# Altium PCB SPTSquidBoardRev0.PcbDoc (part 1 of 2)
Units mil, origin at the board's own origin, x right, y up, seen from the top; angles counter-clockwise.
Board outline 7119.46 x 1780.03 mil, 6 copper layers (Top Layer, Internal Plane 1, Mid-Layer 1, Mid-Layer 2, Internal Plane 2, Bottom Layer), stack 48.451 mil thick; 66 components, 109 nets, 344 pads, 93 vias.
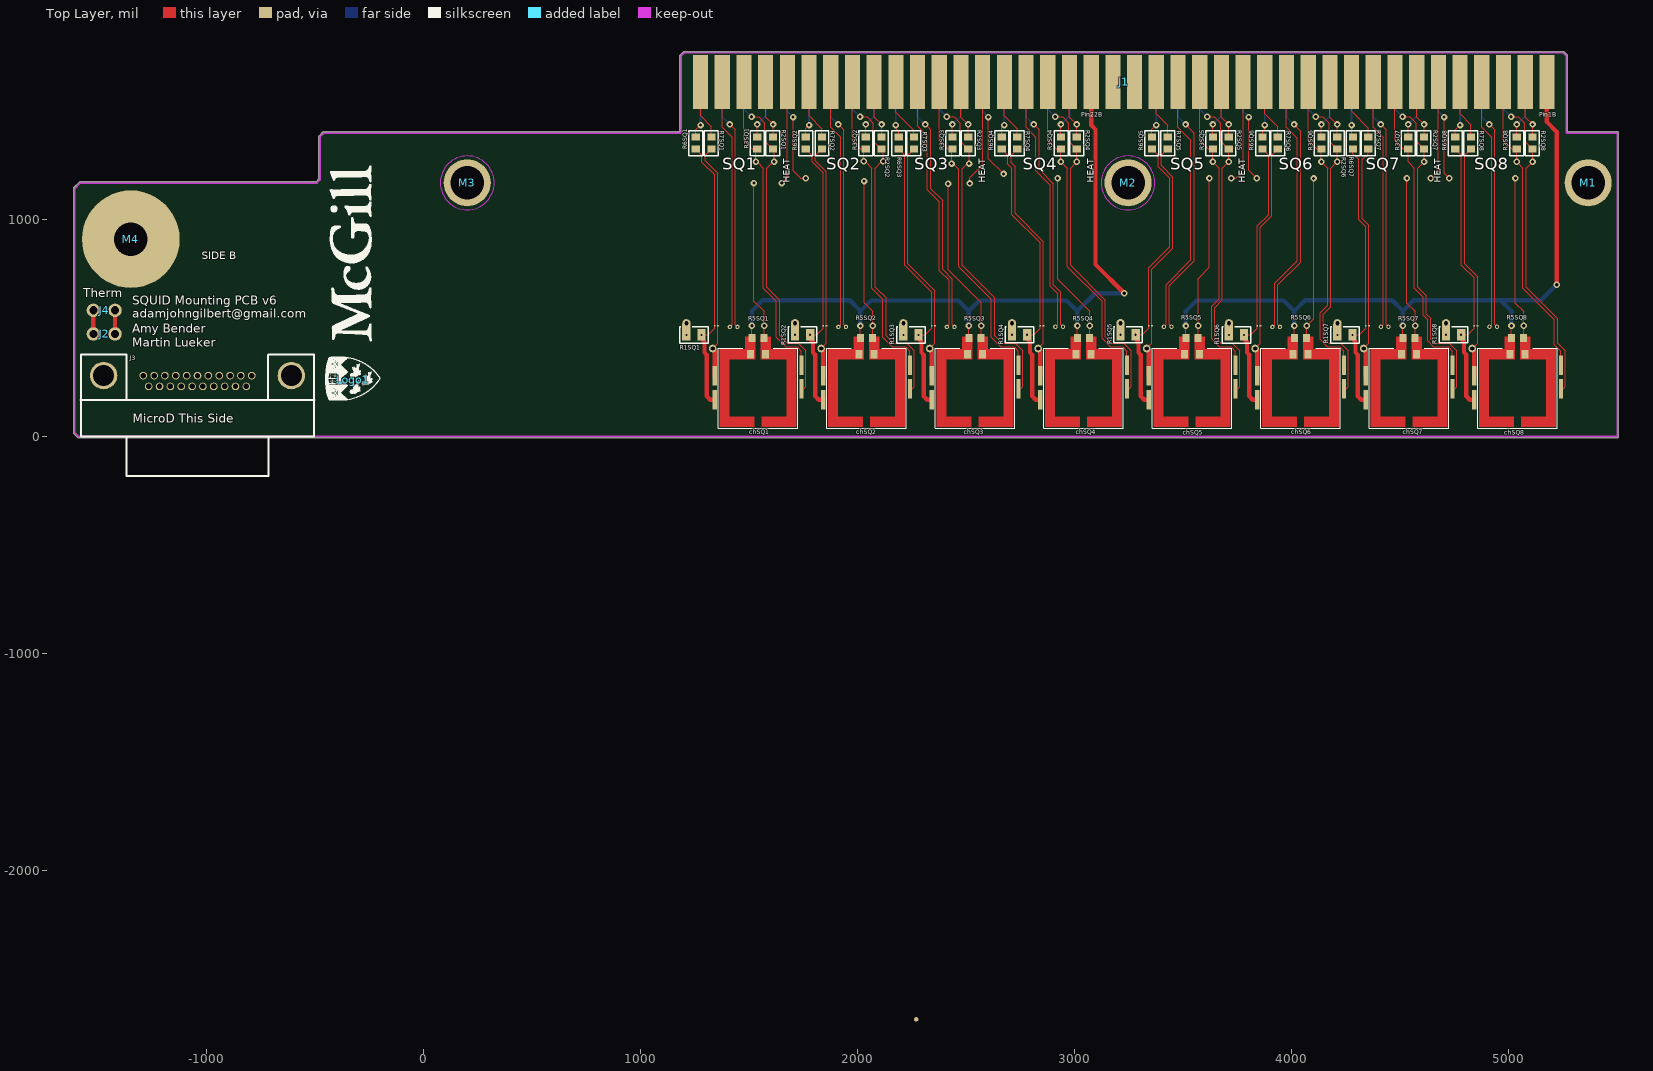
[diagram p0: Top Layer view]
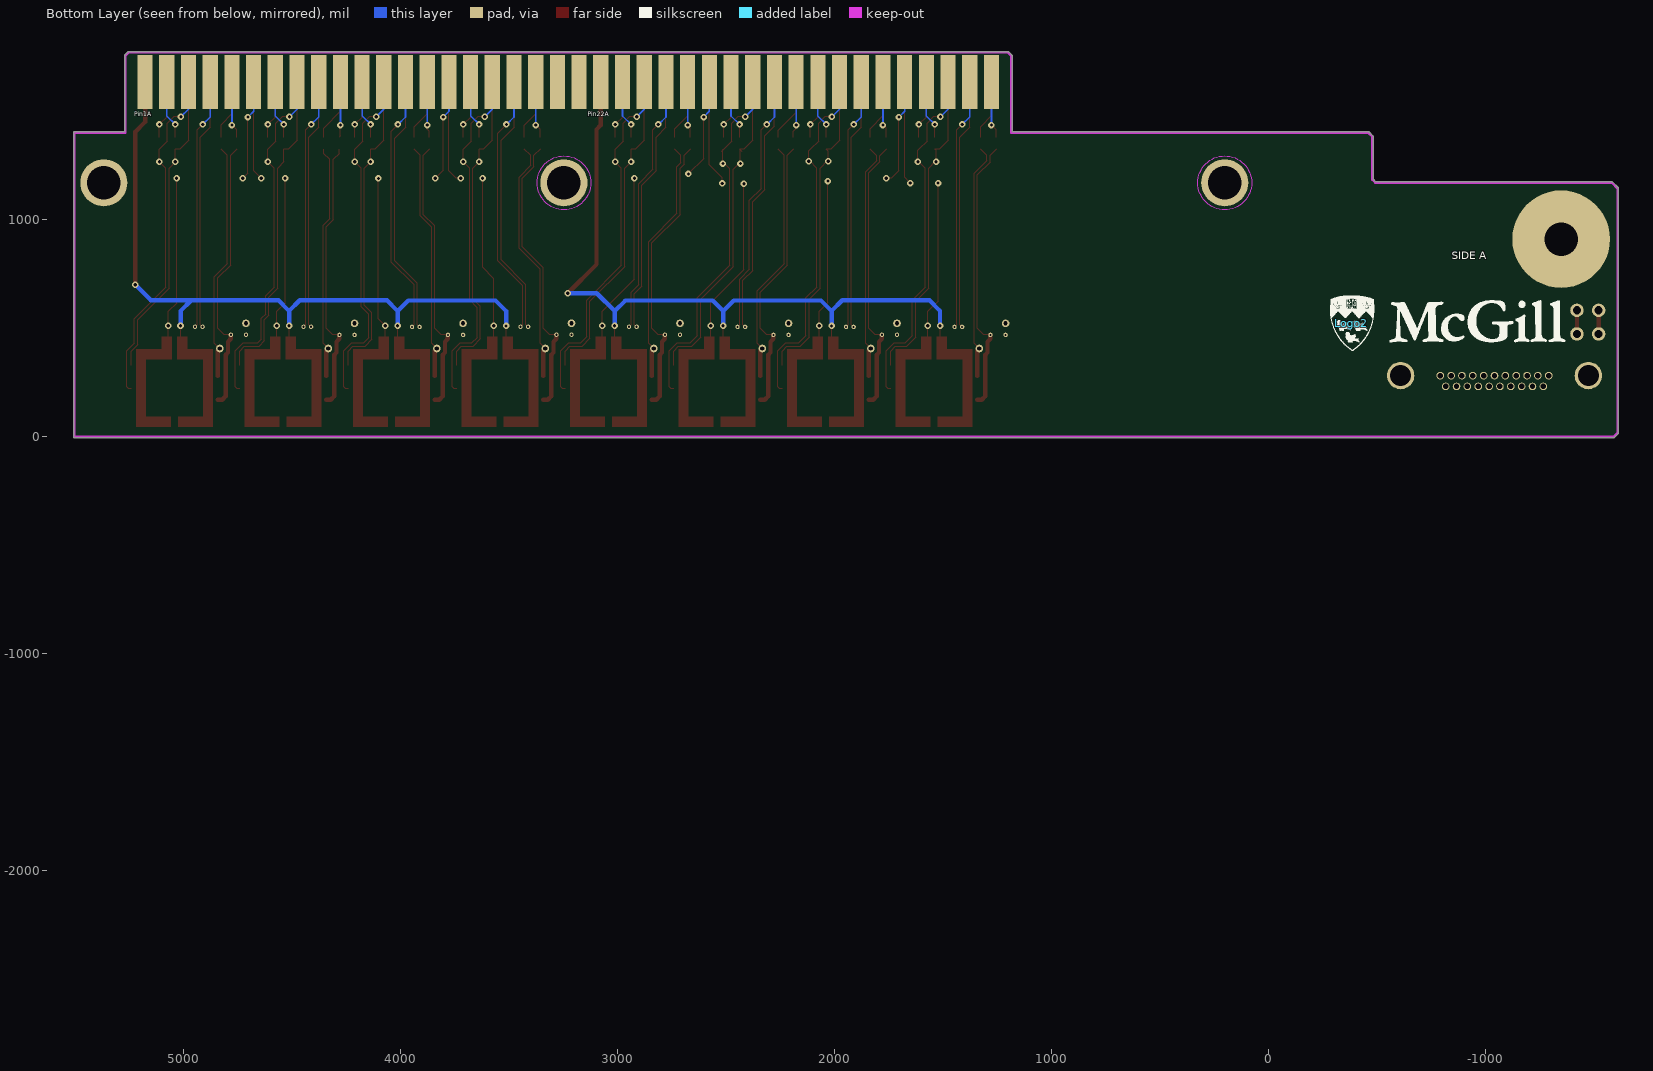
[diagram p1: Bottom Layer view, seen from below]
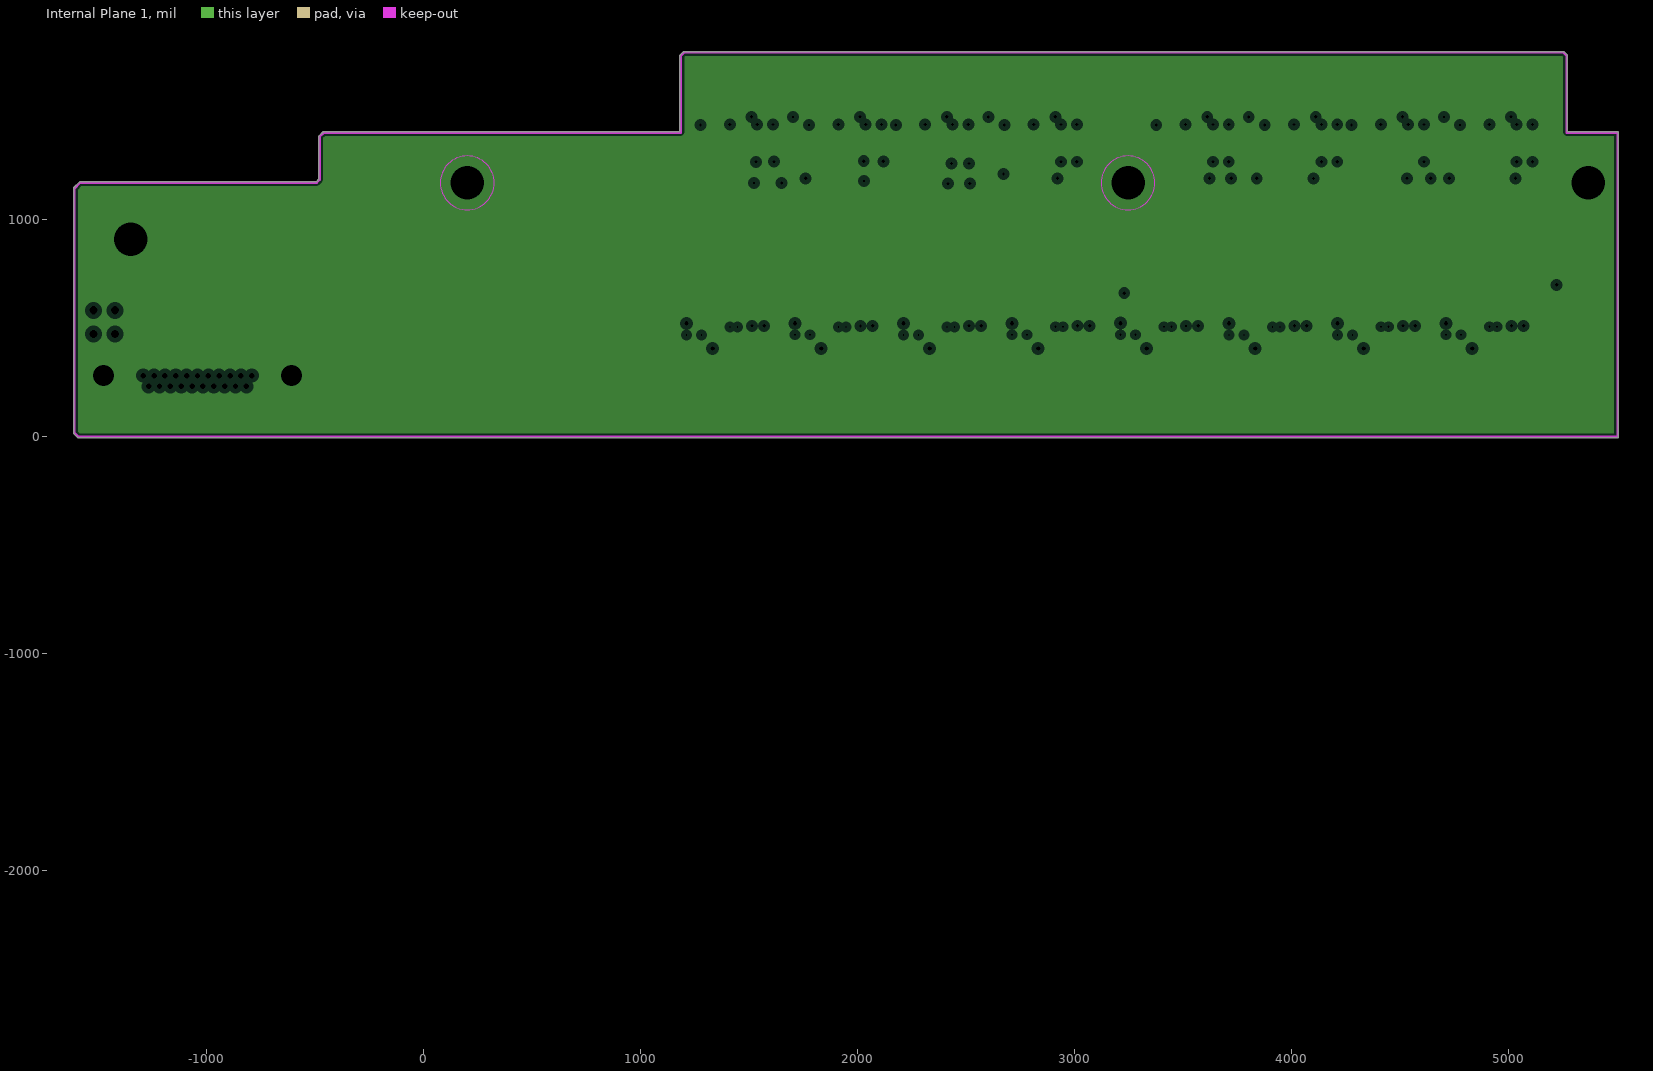
[diagram p2: Internal Plane 1, clearances drawn from the general rule]
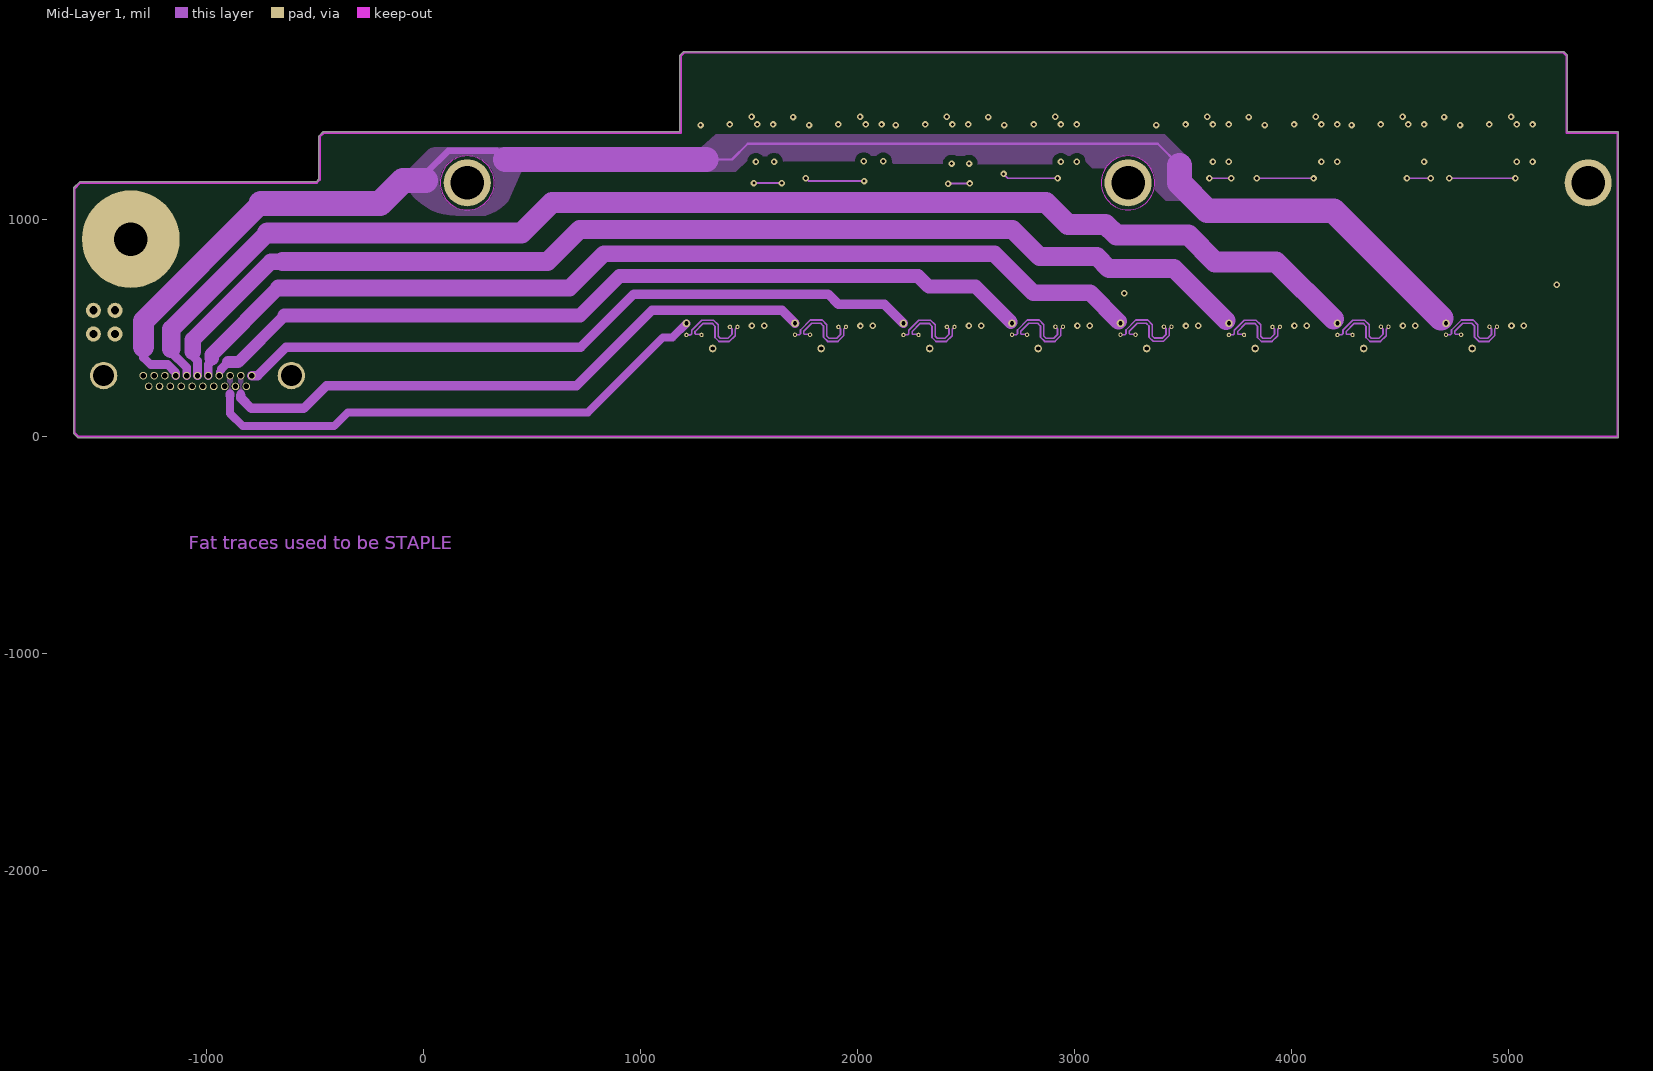
[diagram p3: Mid-Layer 1]
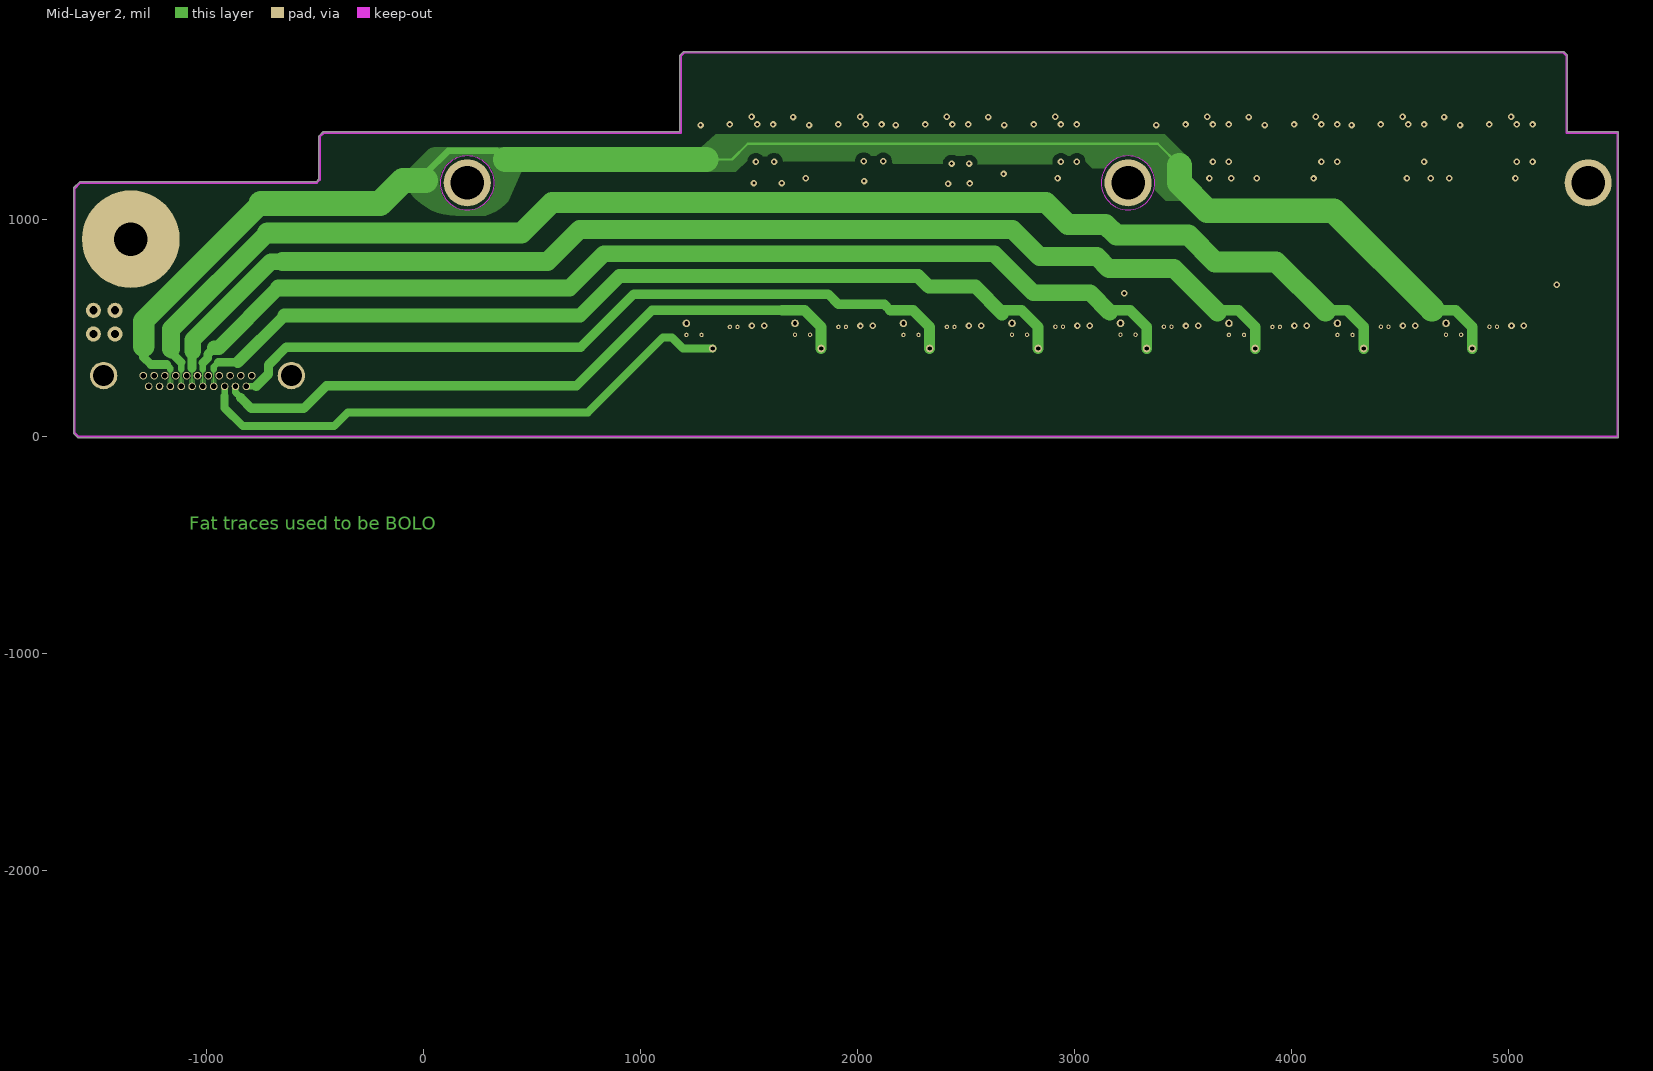
[diagram p4: Mid-Layer 2]
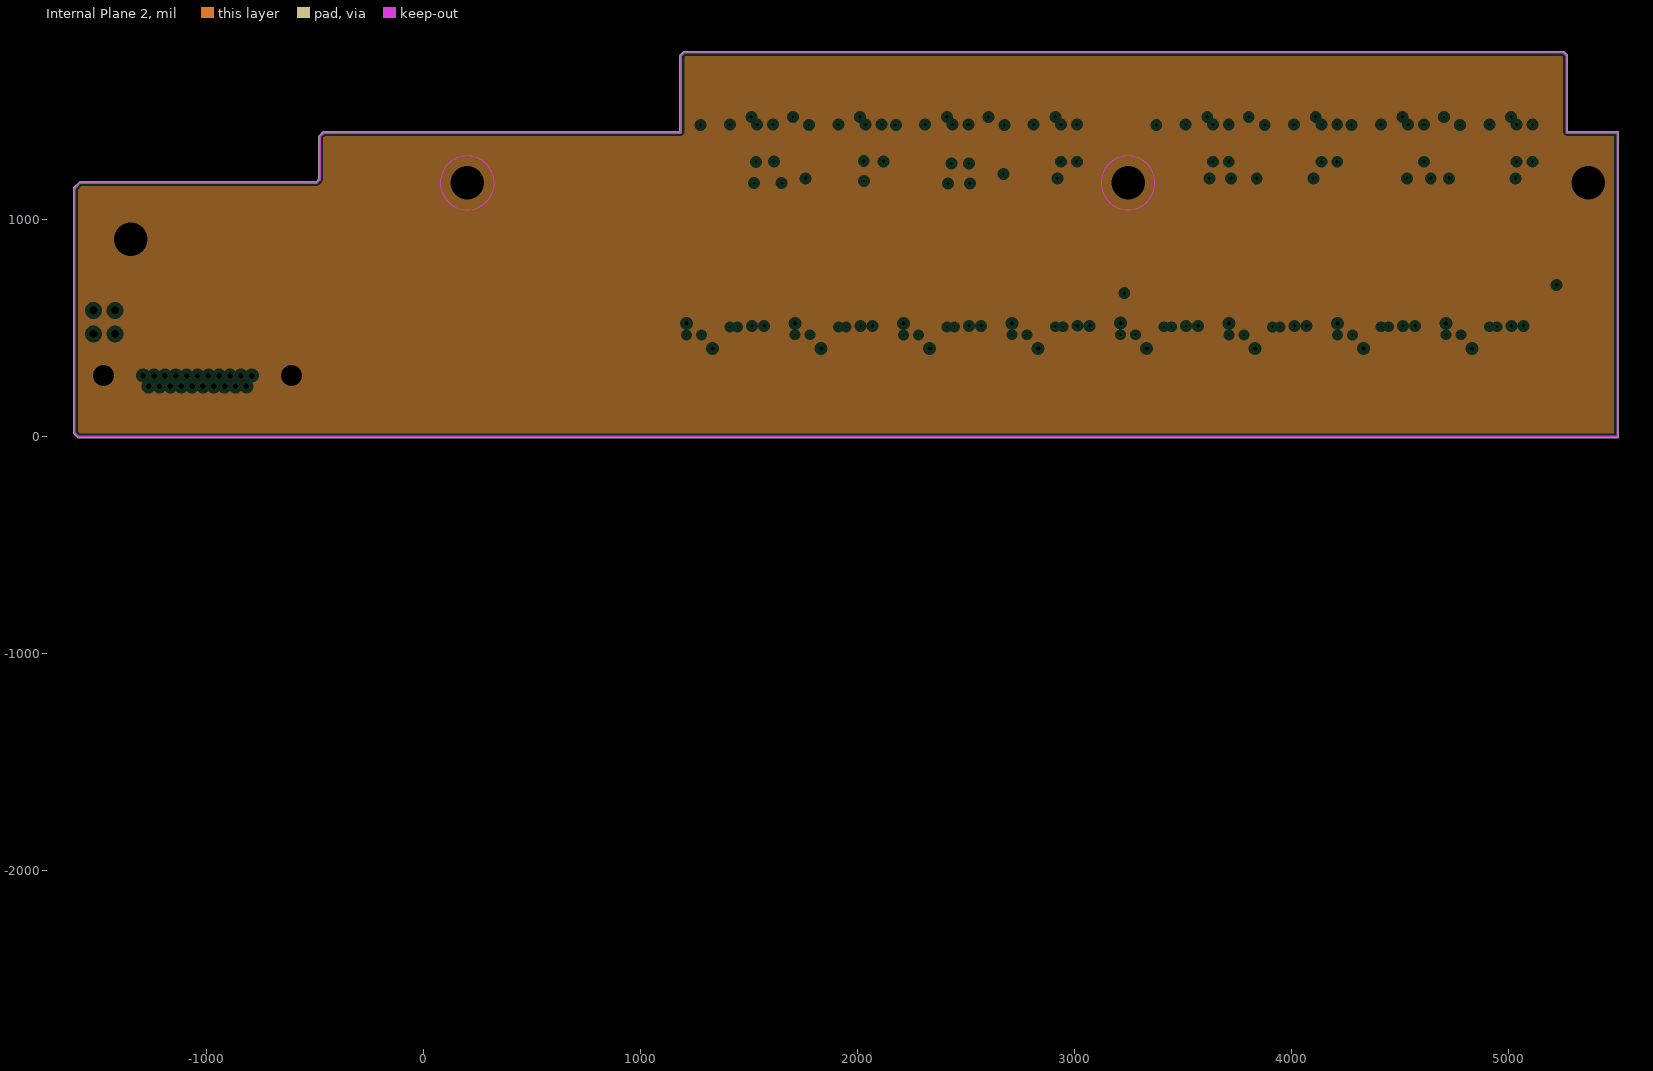
[diagram p5: Internal Plane 2, clearances drawn from the general rule]

## Layer stack, top to bottom
Top Solder: solder mask 0.4, Solder Resist, Dk 3.5
Top Layer: signal copper 1.4
Dielectric 1: core 10, FR-4, Dk 4.2
Internal Plane 1: plane copper 1.417, net GND_POWER
Dielectric 2: prepreg 5, Dk 4.2
Mid-Layer 1: signal copper 1.417
Dielectric 3: core 10, FR-4, Dk 4.2
Mid-Layer 2: signal copper 1.4
Dielectric 4: prepreg 5, Dk 4.2
Internal Plane 2: plane copper 1.417, net GND_POWER
Dielectric 5: core 10, Dk 4.2
Bottom Layer: signal copper 1.4
Bottom Solder: solder mask 0.4, Solder Resist, Dk 3.5

## Board outline
-1612.96,14.15 cw(c-1609.43,17.72) -1614.44,17.72 -1614.44,1143.39 cw(c-1609.43,1143.39) -1612.96,1146.96 -1612.97,1146.94 -1586.37,1173.54 -1586.38,1173.53 cw(c-1582.82,1170) -1582.82,1175.01 -495.35,1175.01 -484.41,1185.95 -484.41,1382.7 cw(c-479.39,1382.7) -482.92,1386.26 -482.94,1386.25 -465.95,1403.24 -465.96,1403.22 cw(c-462.4,1399.69) -462.4,1404.71 878.27,1404.71 cw(c880,1400) 880,1405.02 1179.98,1405.02 1179.98,1755 cw(c1185,1755) 1181.47,1758.56 1181.45,1758.55 1196.45,1773.55 1196.44,1773.53 cw(c1200,1770) 1200,1775.02 5250,1775.02 cw(c5250,1770) 5253.56,1773.53 5253.55,1773.55 5268.55,1758.55 5268.53,1758.56 cw(c5265,1755) 5270.02,1755 5270.02,1405.02 5500,1405.02 cw(c5500,1400) 5505.02,1400 cw(c5500,1400) 5505.01,1399.93 5505.01,0 cw(c5500,0) 5500,-5.01 -1591.71,-5.01 cw(c-1591.71,0) -1595.27,-3.53 -1595.26,-3.55

## Design rules (kind name [scope] priority, off if disabled: settings)
Clearance ClearanceKeepOut [OnLayer('Keep-Out Layer')] p1: gap=1
Clearance [All] p2: gap=5 except(20: Track-Poly Track-Region Via-Poly Via-Region)
DiffPairsRouting DiffPairsRouting_TopDiffPairs [InNetClass('Feedback') or InNetClass('SquidOut')] p1: maxlimit=100 minlimit=5 mostfreqgap=10 toplayer_minwidth=5 toplayer_maxwidth=20 toplayer_prefwidth=5 midlayer1_mingap=10 midlayer1_maxgap=10 midlayer1_minwidth=15 midlayer1_maxwidth=200 midlayer1_prefwidth=15 midlayer2_mingap=10 midlayer2_maxgap=10 midlayer2_minwidth=15 midlayer2_maxwidth=200 midlayer2_prefwidth=15 bottomlayer_prefgap=7 bottomlayer_minwidth=5 bottomlayer_maxwidth=20 bottomlayer_prefwidth=8 maxuncoupledlength=500
DiffPairsRouting [All] p2: maxlimit=100 minlimit=5 mostfreqgap=7 toplayer_minwidth=5 toplayer_maxwidth=200 toplayer_prefwidth=8 midlayer1_minwidth=5 midlayer1_maxwidth=200 midlayer1_prefwidth=8 midlayer2_minwidth=5 midlayer2_maxwidth=200 midlayer2_prefwidth=8 bottomlayer_minwidth=5 bottomlayer_maxwidth=200 bottomlayer_prefwidth=8 maxuncoupledlength=500
HoleSize [All] p1: absolutevalues=TRUE maxlimit=500 minlimit=1 maxpercent=80.000 minpercent=20.000
MinimumSolderMaskSliver MinimumSolderMaskSliver_Track [IsTrack vs IsTrack] p1: minsoldermaskwidth=1
MinimumSolderMaskSliver [All] p2: minsoldermaskwidth=5
NetAntennae NetAntennae_Heaters [InNetClass('Heater')] p1: netantennaetolerance=2000
NetAntennae [All] p2: netantennaetolerance=0
PlaneClearance [All] p1: clearance=20
PlaneConnect [All] p1: planeconnectstyle=Relief reliefexpansion=20 reliefentries=4 reliefconductorwidth=10 reliefairgap=10
PolygonConnect [All] p1: connectstyle=Direct reliefconductorwidth=10 reliefentries=4 polygonreliefangle="90 Angle" airgapwidth=10
RoutingVias [All] p1: holewidth=28 width=50 viastyle="Through Hole" minholewidth=28 minwidth=50 maxholewidth=28 maxwidth=50
SilkToBoardRegionClearance [All] p1 off:
SilkToSilkClearance [All] p1: silktosilkclearance=0
SilkToSolderMaskClearance [IsPad] p1: minsilkscreentomaskgap=5 clearancetoexposedcopper=TRUE
SolderMaskExpansion [All] p1: expansion=0
Width Width_LowInd [InNetClass('LowInductance')] p1: maxlimit=200 minlimit=10 preferedwidth=54 toplayer_minwidth=20 toplayer_prefwidth=20 midlayer1_minwidth=50 midlayer2_minwidth=50 bottomlayer_maxwidth=10 bottomlayer_prefwidth=10 minimp=50.000000 maximp=50.000000 favimp=50.000000
Width [All] p2: maxlimit=200 minlimit=5 preferedwidth=10 minimp=50.000000 maximp=50.000000 favimp=50.000000
21 further rules are at their usual default settings.

## Classes and differential pairs
net class SquidOut: SQ_OUT_N1 SQ_OUT_N2 SQ_OUT_N3 SQ_OUT_N4 SQ_OUT_N5 SQ_OUT_N6 SQ_OUT_N7 SQ_OUT_N8 SQ_OUT_P1 SQ_OUT_P2 SQ_OUT_P3 SQ_OUT_P4 SQ_OUT_P5 SQ_OUT_P6 SQ_OUT_P7 SQ_OUT_P8
net class HEATER[1..8]: HEATER1 HEATER2 HEATER3 HEATER4 HEATER5 HEATER6 HEATER7 HEATER8
net class SQ_OUT_P[1..8]: SQ_OUT_P1 SQ_OUT_P2 SQ_OUT_P3 SQ_OUT_P4 SQ_OUT_P5 SQ_OUT_P6 SQ_OUT_P7 SQ_OUT_P8
net class SQ_OUT_N[1..8]: SQ_OUT_N1 SQ_OUT_N2 SQ_OUT_N3 SQ_OUT_N4 SQ_OUT_N5 SQ_OUT_N6 SQ_OUT_N7 SQ_OUT_N8
net class SQ_IV_P[1..8]: SQ_IV_P1 SQ_IV_P2 SQ_IV_P3 SQ_IV_P4 SQ_IV_P5 SQ_IV_P6 SQ_IV_P7 SQ_IV_P8
net class SQ_IV_N[1..8]: SQ_IV_N1 SQ_IV_N2 SQ_IV_N3 SQ_IV_N4 SQ_IV_N5 SQ_IV_N6 SQ_IV_N7 SQ_IV_N8
component class SQ1: chSQ1 R1SQ1 R2SQ1 R3SQ1 R5SQ1 R6SQ1 R7SQ1
component class SQ2: chSQ2 R1SQ2 R2SQ2 R3SQ2 R5SQ2 R6SQ2 R7SQ2
component class SQ3: chSQ3 R1SQ3 R2SQ3 R3SQ3 R5SQ3 R6SQ3 R7SQ3
component class SQ4: chSQ4 R1SQ4 R2SQ4 R3SQ4 R5SQ4 R6SQ4 R7SQ4
component class SQ5: chSQ5 R1SQ5 R2SQ5 R3SQ5 R5SQ5 R6SQ5 R7SQ5
component class SQ6: chSQ6 R1SQ6 R2SQ6 R3SQ6 R5SQ6 R6SQ6 R7SQ6
component class SQ7: chSQ7 R1SQ7 R2SQ7 R3SQ7 R5SQ7 R6SQ7 R7SQ7
component class SQ8: chSQ8 R1SQ8 R2SQ8 R3SQ8 R5SQ8 R6SQ8 R7SQ8
channel class SquidPage: SQUID1 SQUID2 SQUID3 SQUID4 SQUID5 SQUID6 SQUID7 SQUID8
component class SPTSquidBoard: J1 J2 J3 J4 Logo1 Logo2 M1 M2 M3 M4
net class HEATERG[1..8]: HEATERG4 HEATERG8
net class Heater: HEATER1 HEATER2 HEATER3 HEATER4 HEATER5 HEATER6 HEATER7 HEATER8 HEATERG4 HEATERG8
net class WIRE_N[1..8]: WIRE_N1 WIRE_N2 WIRE_N3 WIRE_N4 WIRE_N5 WIRE_N6 WIRE_N7 WIRE_N8
net class WIRE_P[1..8]: WIRE_P1 WIRE_P2 WIRE_P3 WIRE_P4 WIRE_P5 WIRE_P6 WIRE_P7 WIRE_P8
net class CAR_N[1..8]: CAR_N1 CAR_N2 CAR_N3 CAR_N4 CAR_N5 CAR_N6 CAR_N7 CAR_N8
net class CAR_P[1..8]: CAR_P1 CAR_P2 CAR_P3 CAR_P4 CAR_P5 CAR_P6 CAR_P7 CAR_P8
net class NULL_N[1..8]: NULL_N1 NULL_N2 NULL_N3 NULL_N4 NULL_N5 NULL_N6 NULL_N7 NULL_N8
net class NULL_P[1..8]: NULL_P1 NULL_P2 NULL_P3 NULL_P4 NULL_P5 NULL_P6 NULL_P7 NULL_P8
net class Nul: NSQSQ1_N NSQSQ1_P NSQSQ2_N NSQSQ2_P NSQSQ3_N NSQSQ3_P NSQSQ4_N NSQSQ4_P NSQSQ5_N NSQSQ5_P NSQSQ6_N NSQSQ6_P NSQSQ7_N NSQSQ7_P NSQSQ8_N NSQSQ8_P NULL_N1 NULL_N2 NULL_N3 NULL_N4 NULL_N5 NULL_N6 NULL_N7 NULL_N8 NULL_P1 NULL_P2 NULL_P3 NULL_P4 NULL_P5 NULL_P6 NULL_P7 NULL_P8
net class LowInductance: WIRE_N1 WIRE_N2 WIRE_N3 WIRE_N4 WIRE_N5 WIRE_N6 WIRE_N7 WIRE_N8 WIRE_P1 WIRE_P2 WIRE_P3 WIRE_P4 WIRE_P5 WIRE_P6 WIRE_P7 WIRE_P8
differential pair NSQSQ8: +NSQSQ8_P -NSQSQ8_N
differential pair NSQSQ7: +NSQSQ7_P -NSQSQ7_N
differential pair NSQSQ6: +NSQSQ6_P -NSQSQ6_N
differential pair NSQSQ5: +NSQSQ5_P -NSQSQ5_N
differential pair NSQSQ4: +NSQSQ4_P -NSQSQ4_N
differential pair NSQSQ3: +NSQSQ3_P -NSQSQ3_N
differential pair NSQSQ2: +NSQSQ2_P -NSQSQ2_N
differential pair NSQSQ1: +NSQSQ1_P -NSQSQ1_N
differential pair SQ_OUT8: +SQ_OUT_P8 -SQ_OUT_N8
differential pair SQ_OUT7: +SQ_OUT_P7 -SQ_OUT_N7
differential pair SQ_OUT6: +SQ_OUT_P6 -SQ_OUT_N6
differential pair SQ_OUT5: +SQ_OUT_P5 -SQ_OUT_N5
differential pair SQ_OUT4: +SQ_OUT_P4 -SQ_OUT_N4
differential pair SQ_OUT3: +SQ_OUT_P3 -SQ_OUT_N3
differential pair SQ_OUT2: +SQ_OUT_P2 -SQ_OUT_N2
differential pair SQ_OUT1: +SQ_OUT_P1 -SQ_OUT_N1
differential pair SQ_IV8: +SQ_IV_P8 -SQ_IV_N8
differential pair SQ_IV7: +SQ_IV_P7 -SQ_IV_N7
differential pair SQ_IV6: +SQ_IV_P6 -SQ_IV_N6
differential pair SQ_IV5: +SQ_IV_P5 -SQ_IV_N5
differential pair SQ_IV4: +SQ_IV_P4 -SQ_IV_N4
differential pair SQ_IV3: +SQ_IV_P3 -SQ_IV_N3
differential pair SQ_IV2: +SQ_IV_P2 -SQ_IV_N2
differential pair SQ_IV1: +SQ_IV_P1 -SQ_IV_N1
differential pair WIRE1: +WIRE_P1 -WIRE_N1
differential pair WIRE2: +WIRE_P2 -WIRE_N2
differential pair WIRE3: +WIRE_P3 -WIRE_N3
differential pair WIRE4: +WIRE_P4 -WIRE_N4
differential pair WIRE5: +WIRE_P5 -WIRE_N5
differential pair WIRE6: +WIRE_P6 -WIRE_N6
differential pair WIRE7: +WIRE_P7 -WIRE_N7
differential pair WIRE8: +WIRE_P8 -WIRE_N8
differential pair CAR1: +CAR_P1 -CAR_N1
differential pair CAR2: +CAR_P2 -CAR_N2
differential pair CAR3: +CAR_P3 -CAR_N3
differential pair CAR4: +CAR_P4 -CAR_N4
differential pair CAR5: +CAR_P5 -CAR_N5
differential pair CAR6: +CAR_P6 -CAR_N6
differential pair CAR7: +CAR_P7 -CAR_N7
differential pair CAR8: +CAR_P8 -CAR_N8
differential pair NULL1: +NULL_P1 -NULL_N1
differential pair NULL2: +NULL_P2 -NULL_N2
differential pair NULL3: +NULL_P3 -NULL_N3
differential pair NULL4: +NULL_P4 -NULL_N4
differential pair NULL5: +NULL_P5 -NULL_N5
differential pair NULL6: +NULL_P6 -NULL_N6
differential pair NULL7: +NULL_P7 -NULL_N7
differential pair NULL8: +NULL_P8 -NULL_N8

## Components (designator, comment, footprint, x,y, rotation, side; value= is the part's Value field where it differs from the comment)
chSQ1 "Squid" SQUID 1520,250 r0 top net-tie (schematic designator ch)
chSQ2 "Squid" SQUID 2020,250 r0 top net-tie (schematic designator ch)
chSQ3 "Squid" SQUID 2520,250 r0 top net-tie (schematic designator ch)
chSQ4 "Squid" SQUID 3020,250 r0 top net-tie (schematic designator ch)
chSQ5 "Squid" SQUID 3520,250 r0 top net-tie (schematic designator ch)
chSQ6 "Squid" SQUID 4020,250 r0 top net-tie (schematic designator ch)
chSQ7 "Squid" SQUID 4520,250 r0 top net-tie (schematic designator ch)
chSQ8 "Squid" SQUID 5020,250 r0 top net-tie (schematic designator ch)
J1 "EDGE BOARD-2x40pin" "40 POS/80 CONNECTION, EDGE BOARD" 1275,1635 r0 top locked
J2 "TempSenseWireConnection" TempSenseWireCons -1422.93,473.38 r0 top
J3 "Omnetics MMDP-021-B01-R2" MMDP-021-B02-R2 -1043.13,281.58 r180 top
J4 "TempSenseWireConnection" TempSenseWireCons -1422.93,582.32 r0 top
Logo1 "McGillLogo1" McGillLogo1 -327.34,262.41 r90 top
Logo2 "McGillLogo1" McGillLogo1 -382.07,523.17 r180 bottom
M1 "Mounting hole" MountingHoleSquidBoard#1 5365,1170 r0 top
M2 "Mounting hole" MountingHoleSquidBoard#1 3245,1170 r0 top
M3 "Mounting hole" MountingHoleSquidBoard#1 200,1170 r0 top
M4 "Mounting hole" MountingHoleSquidBoard#2 -1350.13,908.97 r0 top
R1SQ1 "ResBias" 0805NetTie 1279.62,469.28 r180 top net-tie (schematic designator R1)
R1SQ2 "ResBias" 0805NetTie 1780,469.65 r180 top net-tie (schematic designator R1)
R1SQ3 "ResBias" 0805NetTie 2279.62,469.28 r180 top net-tie (schematic designator R1)
R1SQ4 "ResBias" 0805NetTie 2780,469.65 r180 top net-tie (schematic designator R1)
R1SQ5 "ResBias" 0805NetTie 3280,470 r180 top net-tie (schematic designator R1)
R1SQ6 "ResBias" 0805NetTie 3779.62,469.28 r180 top net-tie (schematic designator R1)
R1SQ7 "ResBias" 0805NetTie 4279.62,469.28 r180 top net-tie (schematic designator R1)
R1SQ8 "ResBias" 0805NetTie 4780,469.65 r180 top net-tie (schematic designator R1)
R2SQ1 "0603" 0603 1609,1325 r90 top (schematic designator R2)
R2SQ2 "0603" 0603 2109,1325 r90 top (schematic designator R2)
R2SQ3 "0603" 0603 2509,1325 r90 top (schematic designator R2)
R2SQ4 "0603" 0603 3009,1325 r90 top (schematic designator R2)
R2SQ5 "0603" 0603 3709,1325 r90 top (schematic designator R2)
R2SQ6 "0603" 0603 4209,1325 r90 top (schematic designator R2)
R2SQ7 "0603" 0603 4609,1325 r90 top (schematic designator R2)
R2SQ8 "0603" 0603 5109,1325 r90 top (schematic designator R2)
R3SQ1 "0603" 0603 1536,1381 r270 top (schematic designator R3)
R3SQ2 "0603" 0603 2036,1381 r270 top (schematic designator R3)
R3SQ3 "0603" 0603 2436,1381 r270 top (schematic designator R3)
R3SQ4 "0603" 0603 2936,1381 r270 top (schematic designator R3)
R3SQ5 "0603" 0603 3636,1381 r270 top (schematic designator R3)
R3SQ6 "0603" 0603 4136,1381 r270 top (schematic designator R3)
R3SQ7 "0603" 0603 4536,1381 r270 top (schematic designator R3)
R3SQ8 "0603" 0603 5036,1381 r270 top (schematic designator R3)
R5SQ1 "ResSquidBoard" 0603-NoSilk 1568,455 r180 top (schematic designator R5)
R5SQ2 "ResSquidBoard" 0603-NoSilk 2068,455 r180 top (schematic designator R5)
R5SQ3 "ResSquidBoard" 0603-NoSilk 2568,455 r180 top (schematic designator R5)
R5SQ4 "ResSquidBoard" 0603-NoSilk 3068,455 r180 top (schematic designator R5)
R5SQ5 "ResSquidBoard" 0603-NoSilk 3568,455 r180 top (schematic designator R5)
R5SQ6 "ResSquidBoard" 0603-NoSilk 4068,455 r180 top (schematic designator R5)
R5SQ7 "ResSquidBoard" 0603-NoSilk 4568,455 r180 top (schematic designator R5)
R5SQ8 "ResSquidBoard" 0603-NoSilk 5068,455 r180 top (schematic designator R5)
R6SQ1 "ResSquidBoard" 0603 1253.22,1381 r270 top (schematic designator R6)
R6SQ2 "ResSquidBoard" 0603 1759.55,1381 r270 top (schematic designator R6)
R6SQ3 "ResSquidBoard" 0603 2188.2,1381 r270 top (schematic designator R6)
R6SQ4 "ResSquidBoard" 0603 2662.49,1381 r270 top (schematic designator R6)
R6SQ5 "ResSquidBoard" 0603 3355.02,1381 r270 top (schematic designator R6)
R6SQ6 "ResSquidBoard" 0603 3864.84,1381 r270 top (schematic designator R6)
R6SQ7 "ResSquidBoard" 0603 4281.48,1381 r270 top (schematic designator R6)
R6SQ8 "ResSquidBoard" 0603 4753.16,1381 r270 top (schematic designator R6)
R7SQ1 "ResSquidBoard" 0603 1325,1381 r270 top (schematic designator R7)
R7SQ2 "ResSquidBoard" 0603 1834.45,1381 r270 top (schematic designator R7)
R7SQ3 "ResSquidBoard" 0603 2258.09,1381 r270 top (schematic designator R7)
R7SQ4 "ResSquidBoard" 0603 2734.88,1381 r270 top (schematic designator R7)
R7SQ5 "ResSquidBoard" 0603 3427.41,1381 r270 top (schematic designator R7)
R7SQ6 "ResSquidBoard" 0603 3934.72,1381 r270 top (schematic designator R7)
R7SQ7 "ResSquidBoard" 0603 4351.55,1381 r270 top (schematic designator R7)
R7SQ8 "ResSquidBoard" 0603 4824.94,1381 r270 top (schematic designator R7)

## Footprints (in the part's own frame and the unit in brackets; to place one, negate y for a bottom-side part, rotate by r counter-clockwise, add the part's x,y. Pads: shape width x height; smd on the part's side, far side on the other; paste and mask are expansions set on the pad)
"40 POS/80 CONNECTION, EDGE BOARD" [mil]
  rect 70x250 smd far side: 1A(3900,0) 2A(3800,0) 3A(3700,0) 4A(3600,0) 5A(3500,0) 6A(3400,0) 7A(3300,0) 8A(3200,0) 9A(3100,0) 10A(3000,0) 11A(2900,0) 12A(2800,0) 13A(2700,0) 14A(2600,0) 15A(2500,0) 16A(2400,0) 17A(2300,0) 18A(2200,0) 19A(2100,0) 20A(2000,0) 21A(1900,0) 22A(1800,0) 23A(1700,0) 24A(1600,0) 25A(1500,0) 26A(1400,0) 27A(1300,0) 28A(1200,0) 29A(1100,0) 30A(1000,0) 31A(900,0) 32A(800,0) 33A(700,0) 34A(600,0) 35A(500,0) 36A(400,0) 37A(300,0) 38A(200,0) 39A(100,0) 40A(0,0)
  rect 70x250 smd: 1B(3900,0) 2B(3800,0) 3B(3700,0) 4B(3600,0) 5B(3500,0) 6B(3400,0) 7B(3300,0) 8B(3200,0) 9B(3100,0) 10B(3000,0) 11B(2900,0) 12B(2800,0) 13B(2700,0) 14B(2600,0) 15B(2500,0) 16B(2400,0) 17B(2300,0) 18B(2200,0) 19B(2100,0) 20B(2000,0) 21B(1900,0) 22B(1800,0) 23B(1700,0) 24B(1600,0) 25B(1500,0) 26B(1400,0) 27B(1300,0) 28B(1200,0) 29B(1100,0) 30B(1000,0) 31B(900,0) 32B(800,0) 33B(700,0) 34B(600,0) 35B(500,0) 36B(400,0) 37B(300,0) 38B(200,0) 39B(100,0) 40B(0,0)
0603 [mil]
  rect 32x38 smd: 1(0,0) 2(56,0)
  silkscreen extent -30,-32 86,33
0603-NoSilk [mil]
  rect 32x38 smd: 1(0,0) 2(56,0)
0805NetTie [mil]
  round 20 hole 10 paste-10 mask-10: 1(0,0) 2A(70,0)
  rect 38.5x52 smd: 1(0,0) 2A(70,0)
  round 35 hole 20 paste-10 mask-10: 2B(69.7,-52.92)
  round 38.5 smd paste-19.25 mask-19.25: 2B(69.7,-52.92)
  rect 38.5x50 smd paste-19.25 mask-19.25: 2B(70.04,-25.91)
  silkscreen extent -31,-38 101,38
McGillLogo1 [mil] "McGillLogo"
  silkscreen extent -95,-127 986,124
MMDP-021-B02-R2 [mil] "Omnetrics21pinR2Tail"
  round 35 hole 25: 1(250,0) 2(200,0) 3(150,0) 4(100,0) 5(50,0) 6(0,0) 7(-50,0) 8(-100,0) 9(-150,0) 10(-200,0) 11(-250,0) 12(225,50) 13(175,50) 14(125,50) 15(75,50) 16(25,50) 17(-25,50) 18(-75,50) 19(-125,50) 20(-175,50) 21(-225,50)
  round 125.98 hole 96.06: MH1(-432.5,0) MH2(432.5,0)
  silkscreen extent -538,-97 538,463
MountingHoleSquidBoard#1 [mil]
  round 217 hole 154: 0(0,0)
MountingHoleSquidBoard#2 [mil]
  round 450 hole 154: 0(0,1.57)
SQUID [mil]
  rect 20x90 smd: 1(-180,30) 2(-180.13,-80.01) 3(220,-30) 4(220,80)
  rect 8x8 smd paste-4 mask-4: 1A(-164.65,261) 2A(-179.65,261)
  round 35 hole 20: 1B(-189.15,156.5)
  round 10 smd paste-5 mask-5: 2B(-240,220)
  rect 32x38 smd paste-20 mask-20: 5(55,130) 6(-15,130)
  Top Layer region: 78,210 33,210 32,209 32,107 152,107 152,-159 37.41,-159 37,-160 37,-203 197,-203 197,153 78,153
  Top Layer region: -38,210 7,210 8,209 8,107 -112,107 -112,-159 2.59,-159 3,-160 3,-203 -157,-203 -157,153 -38,153
  Top Layer lines w5: -240,219.65 -240.38,219.28 -210.38,219.28 -179.65,250 -179.65,261 ; -189.15,156.5 -164.65,181 -164.65,250 -164.65,261
  Top Layer lines w20: -240,219.65 -240,201 -227,188 -227,138 -217,128 -217,89 -217,-63 -199.99,-80.01 -180.13,-80.01 ; -189.15,156.5 -180,147.35 -180,30
  silkscreen extent -163,-210 203,158
TempSenseWireCons [mil]
  round 62 / inner round 70 / far side round 62 hole 38 mask+5: 1(0,0) 2(-100,0)

## Part data
J1: "Edge connector"
J2 J4: library part TempSenseCon
J3: library part OmneticsMicroD21, "OmneticsMicroD21"
Logo1 Logo2: library part Logo
M1 M2 M3 M4: library part SquidBoardMountingHole
R1SQ1 R1SQ2 R1SQ3 R1SQ4 R1SQ5 R1SQ6 R1SQ7 R1SQ8 R5SQ1 R5SQ2 R5SQ3 R5SQ4 R5SQ5 R5SQ6 R5SQ7 R5SQ8 R6SQ1 R6SQ2 R6SQ3 R6SQ4 R6SQ5 R6SQ6 R6SQ7 R6SQ8 R7SQ1 R7SQ2 R7SQ3 R7SQ4 R7SQ5 R7SQ6 R7SQ7 R7SQ8: "Resistor"
R2SQ1 R2SQ2 R2SQ3 R2SQ4 R2SQ5 R2SQ6 R2SQ7 R2SQ8 R3SQ1 R3SQ2 R3SQ3 R3SQ4 R3SQ5 R3SQ6 R3SQ7 R3SQ8: library part Res0603, "RES 1 OHM 1/10W 1% 0603 SMD"

## Free pads (board coordinates)
  round 20 smd: 0(2268.91,-2684.58)
  round 20 hole 10: 1(1410,506) 1(1910,506) 1(2410,506) 1(2910,506.35) 1(3410,506.35) 1(3910,506) 1(4410,506.35) 1(4910,506.35) 2(1445,506) 2(1945,506) 2(2445,506) 2(2945,506.35) 2(3445,506.35) 2(3945,506) 2(4445,506.35) 2(4945,506.35)

## Via types
v1: diameter 30, hole 15, Top Layer to Bottom Layer, 93 vias

## Nets (pads, with @x,y where several pads share a name; then routed paths per layer and width w, separated by ;. In a path a pad name is that pad's centre, name@x,y a point inside that pad or via, vN(x,y) a via of type N, cw(c..) or ccw(c..) an arc to the next point about the centre after c; other vN are vias at no path point)
CAR_N1: chSQ1.2B J1.39A pad.2@1445,506 R1SQ1.1 | length 1522.1
  Top Layer w5: v1(1410,1439) 1435,1414 1435,516 pad.2@1445,506
  Mid-Layer 1 w8: R1SQ1.1@1280,470.65 1280,471.65 1253.35,471.65 1250,475 1250,485 1287.19,522.19 1328.66,522.19 1341.45,509.39 1341.45,457.33 1360.13,438.65 1407.87,438.65 1435,465.79 1435,496 pad.2@1445,506
  Bottom Layer w8: J1.39A@1375,1635 1375,1473 1409,1439 v1(1410,1439)
CAR_N2: chSQ2.2B J1.34A pad.2@1945,506 R1SQ2.1 | length 1522.1
  Top Layer w5: v1(1910,1439) 1935,1414 1935,516 pad.2@1945,506
  Mid-Layer 1 w8: R1SQ2.1@1780.38,471.03 1780.38,472.03 1753.72,472.03 1750.38,475.38 1750.38,485.38 1787.57,522.57 1829.03,522.57 1841.83,509.77 1841.83,457.71 1860.51,439.03 1908.24,439.03 1935.38,466.16 1935.38,496.38 pad.2@1945.38,506.38
  Bottom Layer w8: J1.34A@1875,1635 1875,1473 1909,1439 v1(1910,1439)
CAR_N3: chSQ3.2B J1.30A pad.2@2445,506 R1SQ3.1 | length 1563.5
  Top Layer w5: v1(2310,1439) 2335,1414 2335,1143.53 2390,1088.53 2390,771.21 2435,726.21 2435,516 pad.2@2445,506
  Mid-Layer 1 w8: R1SQ3.1@2280,470.65 2280,471.65 2253.35,471.65 2250,475 2250,485 2287.19,522.19 2328.66,522.19 2341.45,509.39 2341.45,457.33 2360.13,438.65 2407.87,438.65 2435,465.79 2435,496 pad.2@2445,506
  Bottom Layer w8: J1.30A@2275,1635 2275,1473 2309,1439 v1(2310,1439)
CAR_N4: chSQ4.2B J1.25A pad.2@2945,506.35 R1SQ4.1 | length 1563.1
  Top Layer w5: v1(2810,1439) 2835,1414 2835,1231.56 2900.61,1165.95 2900.61,700.03 2935,665.64 2935,516.35 pad.2@2945,506.35
  Mid-Layer 1 w8: R1SQ4.1@2780.38,471.03 2780.38,472.03 2753.72,472.03 2750.38,475.38 2750.38,485.38 2787.57,522.57 2829.03,522.57 2841.83,509.77 2841.83,457.71 2860.51,439.03 2908.24,439.03 2935.38,466.16 2935.38,496.38 pad.2@2945.38,506.38
  Bottom Layer w8: J1.25A@2775,1635 2775,1473 2809,1439 v1(2810,1439)
CAR_N5: chSQ5.2B J1.18A pad.2@3445,506.35 R1SQ5.1 | length 1611.3
  Top Layer w5: pad.2@3445,506.35 3435,516.35 3435,695 3550,810 3550,1398 v1@3509,1439 ; v1(3510,1439) 3535,1414
  Mid-Layer 1 w8: R1SQ5.1@3280.38,471.38 3280.38,472.38 3253.72,472.38 3250.38,475.72 3250.38,485.72 3287.57,522.92 3329.03,522.92 3341.83,510.12 3341.83,458.06 3360.51,439.38 3408.24,439.38 3435.38,466.51 3435.38,496.72 pad.2@3445,506.35 pad.2@3445.38,506.72
  Bottom Layer w8: J1.18A@3475,1635 3475,1473 3509,1439 v1(3510,1439)
CAR_N6: chSQ6.2B J1.13A pad.2@3945,506 R1SQ6.1 | length 1603.4
  Top Layer w5: pad.2@3945,506 3935,516 3935,700 4040,805 4040,1408 v1@4009,1439 ; v1(4010,1439) 4035,1414
  Mid-Layer 1 w8: R1SQ6.1@3780,470.65 3780,471.65 3753.35,471.65 3750,475 3750,485 3787.19,522.19 3828.66,522.19 3841.45,509.39 3841.45,457.33 3860.13,438.65 3907.87,438.65 3935,465.79 3935,496 pad.2@3945,506
  Bottom Layer w8: J1.13A@3975,1635 3975,1473 4009,1439 v1(4010,1439)
CAR_N7: chSQ7.2B J1.9A pad.2@4445,506.35 R1SQ7.1 | length 1521.7
  Top Layer w5: v1(4410,1439) 4435,1414 4435,516.35 pad.2@4445,506.35
  Mid-Layer 1 w8: R1SQ7.1@4280,470.65 4280,471.65 4253.35,471.65 4250,475 4250,485 4287.19,522.19 4328.66,522.19 4341.45,509.39 4341.45,457.33 4360.13,438.65 4407.87,438.65 4435,465.79 4435,496 pad.2@4445,506
  Bottom Layer w8: J1.9A@4375,1635 4375,1473 4409,1439 v1(4410,1439)
CAR_N8: chSQ8.2B J1.4A pad.2@4945,506.35 R1SQ8.1 | length 1521.7
  Top Layer w5: v1(4910,1439) 4935,1414 4935,516.35 pad.2@4945,506.35
  Mid-Layer 1 w8: R1SQ8.1@4780.38,471.03 4780.38,472.03 4753.72,472.03 4750.38,475.38 4750.38,485.38 4787.57,522.57 4829.03,522.57 4841.83,509.77 4841.83,457.71 4860.51,439.03 4908.24,439.03 4935.38,466.16 4935.38,496.38 pad.2@4945.38,506.38
  Bottom Layer w8: J1.4A@4875,1635 4875,1473 4909,1439 v1(4910,1439)
CAR_P1: J1.39B pad.1@1410,506 R1SQ1.2A | length 1528.1
  Top Layer w5: J1.39B@1375,1635 1375,1425 1420,1380 1420,516 pad.1@1410,506
  Mid-Layer 1 w8: R1SQ1.2A@1209.25,468.55 1226.67,468.55 ; R1SQ1.2A@1209.62,469.28 1229.28,469.28 1235,475 1235,491.21 1280.98,537.19 1334.87,537.19 1356.45,515.61 1356.45,463.55 1366.35,453.65 1401.65,453.65 1420,472 1420,496 pad.1@1410,506
CAR_P2: J1.34B pad.1@1910,506 R1SQ2.2A | length 1510.6
  Top Layer w5: J1.34B@1875,1635 1875,1425 1920,1380 1920,516 pad.1@1910,506
  Mid-Layer 1 w8: R1SQ2.2A@1710,469.65 1729.65,469.65 1735.38,475.38 1735.38,491.59 1781.36,537.57 1835.25,537.57 1856.83,515.98 1856.83,463.92 1866.72,454.03 1902.03,454.03 1920.38,472.38 1920.38,496.38 pad.1@1910.38,506.38
CAR_P3: J1.30B pad.1@2410,506 R1SQ3.2A | length 1552.1
  Top Layer w5: J1.30B@2275,1635 2275,1431.13 2320,1386.13 2320,1137.31 2375,1082.31 2375,765 2420,720 2420,516 pad.1@2410,506
  Mid-Layer 1 w8: R1SQ3.2A@2209.62,469.28 2229.28,469.28 2235,475 2235,491.21 2280.98,537.19 2334.87,537.19 2356.45,515.61 2356.45,463.55 2366.35,453.65 2401.65,453.65 2420,472 2420,496 pad.1@2410,506
CAR_P4: J1.25B pad.1@2910,506.35 R1SQ4.2A | length 1551.7
  Top Layer w5: J1.25B@2775,1635 2775,1425 2820,1380 2820,1225.35 2885.61,1159.74 2885.61,693.82 2920,659.43 2920,516.35 pad.1@2910,506.35
  Mid-Layer 1 w8: R1SQ4.2A@2710,469.65 2729.65,469.65 2735.38,475.38 2735.38,491.59 2781.36,537.57 2835.25,537.57 2856.83,515.98 2856.83,463.92 2866.72,454.03 2902.03,454.03 2920.38,472.38 2920.38,496.38 pad.1@2910.38,506.38
CAR_P5: J1.18B pad.1@3410,506.35 R1SQ5.2A | length 1564.1
  Top Layer w5: pad.1@3410,506.35 3420,516.35 3420,701.21 3535,816.21 3535,1365 3475,1425 J1.18B@3475,1635
  Mid-Layer 1 w8: R1SQ5.2A@3210,470 3229.65,470 3235.38,475.72 3235.38,491.94 3281.36,537.92 3335.25,537.92 3356.83,516.33 3356.83,464.27 3366.72,454.38 3402.03,454.38 3420.38,472.72 3420.38,496.72 pad.1@3410.38,506.72
CAR_P6: J1.13B pad.1@3910,506 R1SQ6.2A | length 1556.2
  Top Layer w5: pad.1@3910,506 3920,516 3920,706.21 4025,811.21 4025,1375 3975,1425 J1.13B@3975,1635
  Mid-Layer 1 w8: R1SQ6.2A@3709.62,469.28 3729.28,469.28 3735,475 3735,491.21 3780.98,537.19 3834.87,537.19 3856.45,515.61 3856.45,463.55 3866.35,453.65 3901.65,453.65 3920,472 3920,496 pad.1@3910,506
CAR_P7: J1.9B pad.1@4410,506.35 R1SQ7.2A | length 1510.3
  Top Layer w5: J1.9B@4375,1635 4375,1425 4420,1380 4420,516.35 pad.1@4410,506.35
  Mid-Layer 1 w8: R1SQ7.2A@4209.62,469.28 4229.28,469.28 4235,475 4235,491.21 4280.98,537.19 4334.87,537.19 4356.45,515.61 4356.45,463.55 4366.35,453.65 4401.65,453.65 4420,472 4420,496 pad.1@4410,506
CAR_P8: J1.4B pad.1@4910,506.35 R1SQ8.2A | length 1510.3
  Top Layer w5: J1.4B@4875,1635 4875,1425 4920,1380 4920,516.35 pad.1@4910,506.35
  Mid-Layer 1 w8: R1SQ8.2A@4710,469.65 4729.65,469.65 4735.38,475.38 4735.38,491.59 4781.36,537.57 4835.25,537.57 4856.83,515.98 4856.83,463.92 4866.72,454.03 4902.03,454.03 4920.38,472.38 4920.38,496.38 pad.1@4910.38,506.38
GND_POWER: J3.MH1 J3.MH2 M1.0 M2.0 M3.0 M4.0
HEATER1: chSQ1.5 J1.36B R5SQ1.1 | length 1416
  Top Layer w5: v1(1521.09,1169.07) 1521.09,623.91 1568,577 v1(1568,511) R5SQ1.1@1568,455 1568,387 chSQ1.5@1575,380 ; v1(1649.01,1169.07) 1675,1195.06 J1.36B@1675,1635
  Mid-Layer 1 w8: v1(1521.09,1169.07) v1(1649.01,1169.07)
HEATER2: chSQ2.5 J1.36A R5SQ2.1 | length 1583.6
  Top Layer w5: v1(1701.16,1473) 1701.16,1226.09 1736.57,1190.67 v1(1759.59,1190.67) ; v1(2028.3,1178.03) 2028.3,616.7 2068,577 v1(2068,511) R5SQ2.1@2068,455 2068,387 chSQ2.5@2075,380
  Mid-Layer 1 w8: v1@1760,1190.26 1760.82,1190.26 1773.06,1178.03 v1(2028.3,1178.03)
  Bottom Layer w8: J1.36A@1675,1635 1675,1499.16 v1(1701.16,1473)
HEATER3: chSQ3.5 J1.27B R5SQ3.1 | length 1445.1
  Top Layer w5: v1(2415.66,1165.95) 2415.66,768.77 2568,616.43 v1(2568,511) R5SQ3.1@2568,455 2568,387 chSQ3.5@2575,380 ; v1(2515.74,1166.92) 2515.74,1193.01 2575,1252.28 J1.27B@2575,1635
  Mid-Layer 1 w8: v1(2415.66,1165.95) 2416.62,1166.92 v1(2515.74,1166.92)
HEATER4: chSQ4.5 J1.27A R5SQ4.1 | length 1596
  Top Layer w5: v1(2601.16,1473) 2601.16,1280.97 v1(2671.48,1210.65) ; v1(2920,1190.67) 2920,725 3068,577 v1(3068,511) R5SQ4.1@3068,455 3068,387 chSQ4.5@3075,380
  Mid-Layer 1 w8: v1(2671.48,1210.65) 2691.45,1190.67 v1(2920,1190.67)
  Bottom Layer w8: J1.27A@2575,1635 2575,1499.16 v1(2601.16,1473)
HEATER5: chSQ5.5 J1.15B R5SQ5.1 | length 1414.3
  Top Layer w5: chSQ5.5@3575,380 3568,387 R5SQ5.1@3568,455 v1(3568,511) 3568,728 3620,780 v1(3620,1190.67) ; v1(3720,1190.67) 3740.67,1190.67 3775,1225 J1.15B@3775,1635
  Mid-Layer 1 w8: v1(3620,1190.67) v1(3720,1190.67)
HEATER6: chSQ6.5 J1.15A R5SQ6.1 | length 1559.6
  Top Layer w5: v1(3801.16,1473) 3801.16,1227.51 v1(3838,1190.67) ; chSQ6.5@4075,380 4068,387 R5SQ6.1@4068,455 v1(4068,511) 4100,543 v1(4100,1190.26) v1@4100.41,1190.67
  Mid-Layer 1 w8: v1(3838,1190.67) 4099.59,1190.67 v1(4100,1190.26)
  Bottom Layer w8: J1.15A@3775,1635 3775,1499.16 v1(3801.16,1473)
HEATER7: chSQ7.5 J1.6B R5SQ7.1 | length 1925.1
  Top Layer w5: v1(4530.41,1190.67) 4530.41,614.59 4568,577 v1(4568,511) R5SQ7.1@4568,455 4568,387 chSQ7.5@4575,380 4677.48,380 4696.87,360.61 4696.87,86.82 4680.05,70 4580,70 ; v1(4640,1190.67) 4675,1225.67 J1.6B@4675,1635
  Mid-Layer 1 w8: v1(4530.41,1190.67) v1(4640,1190.67)
HEATER8: chSQ8.5 J1.6A R5SQ8.1 | length 1599.6
  Top Layer w5: v1(4701.16,1473) 4701.16,1214.51 v1(4725,1190.67) ; v1(5030.41,1190.67) 5030.41,614.59 5068,577 v1(5068,511) R5SQ8.1@5068,455 5068,387 chSQ8.5@5075,380
  Mid-Layer 1 w8: v1(4725,1190.67) v1(5030.41,1190.67)
  Bottom Layer w8: J1.6A@4675,1635 4675,1499.16 v1(4701.16,1473)
HEATERG4: chSQ1.6 chSQ2.6 chSQ3.6 chSQ4.6 J1.22B R5SQ1.2 R5SQ2.2 R5SQ3.2 R5SQ4.2 | length 3718.9
  Top Layer w5: chSQ1.6@1505,380 1512,387 R5SQ1.2@1512,455 v1(1512,511) ; chSQ2.6@2005,380 2012,387 R5SQ2.2@2012,455 ; R5SQ2.2@2011.62,454.62 v1(2011.62,510.62) ; chSQ3.6@2505,380 2512,387 R5SQ3.2@2512,455 v1(2512,511) ; chSQ4.6@3005,380 3012,387 R5SQ4.2@3012,455 v1(3012,511.35)
  Top Layer w20: J1.22B@3075,1635 3075,1436 3095,1416 3095,793.96 v1(3227.57,661.39)
  Bottom Layer w20: v1(1512,511) 1512,579.82 1560.52,628.34 1962.72,628.34 2011.62,579.44 ; v1(2011.62,510.62) 2011.62,579.44 ; v1@2511.25,510.25 2511.25,579.07 ; v1@3010.87,509.87 3010.87,578.69 ; v1(3227.57,661.39) 3093.57,661.39 3010.87,578.69 ; 2011.62,579.44 2060.15,627.97 2462.35,627.97 2511.25,579.07 ; 2511.25,579.07 2559.77,627.59 2961.97,627.59 3010.87,578.69
HEATERG8: chSQ5.6 chSQ6.6 chSQ7.6 chSQ8.6 J1.1B R5SQ5.2 R5SQ6.2 R5SQ7.2 R5SQ8.2 | length 3727.4
  Top Layer w5: chSQ5.6@3505,380 3512,387 R5SQ5.2@3512,455 v1@3512,511 ; R5SQ5.2@3511.62,454.62 v1(3511.62,510.62) ; chSQ6.6@4005,380 4012,387 R5SQ6.2@4012,455 v1(4012,511) ; chSQ7.6@4505,380 4512,387 R5SQ7.2@4512,455 v1(4512,511) ; chSQ8.6@5005,380 5012,387 R5SQ8.2@5012,455 v1(5012,511)
  Top Layer w20: J1.1B@5175,1635 5175,1450 5220,1405 v1(5220,700)
  Bottom Layer w20: v1(3511.62,510.62) 3511.62,579.44 3560.15,627.97 3962.35,627.97 4011.25,579.07 v1@4011.25,510.25 ; 4012,579.82 4060.52,628.34 4462.72,628.34 4511.62,579.44 v1@4511.62,510.62 ; 4512,579.82 4560.52,628.34 4962.72,628.34 ; v1@5011.62,510.62 5011.62,579.44 4962.72,628.34 ; v1(5220,700) 5148.34,628.34 4962.72,628.34
NetJ2_1: J2.1 J4.1 | length 108.9
  Top Layer w20: J2.1@-1422.93,473.38 J4.1@-1422.93,582.32
NetJ2_2: J2.2 J4.2 | length 108.9
  Top Layer w20: J2.2@-1522.93,473.38 J4.2@-1522.93,582.32
NSQSQ1_N: chSQ1.1A R7SQ1.2 | length 850.1
  Top Layer w5: R7SQ1.2@1325,1325 1296.61,1296.61 1296.61,1271.89 1355.35,1213.16 chSQ1.1A@1355.35,511
NSQSQ1_P: chSQ1.2A R6SQ1.2 | length 850.1
  Top Layer w5: R6SQ1.2@1253.22,1325 1281.61,1296.61 1281.61,1265.68 1340.35,1206.94 chSQ1.2A@1340.35,511
NSQSQ2_N: chSQ2.1A R7SQ2.2 | length 847.5
  Top Layer w5: R7SQ2.2@1834.45,1325 1804.5,1295.05 1804.5,1272.33 1855.35,1221.48 chSQ2.1A@1855.35,511
NSQSQ2_P: chSQ2.2A R6SQ2.2 | length 847.5
  Top Layer w5: R6SQ2.2@1759.55,1325 1789.5,1295.05 1789.5,1266.12 1840.35,1215.27 chSQ2.2A@1840.35,511
NSQSQ3_N: chSQ3.1A R7SQ3.2 | length 877
  Top Layer w5: R7SQ3.2@2258.09,1325 2230.64,1297.56 2230.64,797.33 2355.35,672.63 chSQ3.1A@2355.35,511
NSQSQ3_P: chSQ3.2A R6SQ3.2 | length 877
  Top Layer w5: R6SQ3.2@2188.2,1325 2215.64,1297.56 2215.64,791.12 2340.35,666.42 chSQ3.2A@2340.35,511
NSQSQ4_N: chSQ4.1A R7SQ4.2 | length 894
  Top Layer w5: 2725,1152.37 2725,1146.16 ; R7SQ4.2@2734.88,1325 2706.19,1296.31 2706.19,1262.67 2725.11,1243.74 2725.11,1146.27 2725,1146.16 ; chSQ4.1A@2855.35,511 2855.35,898.87 2725,1029.21 2725,1146.16
NSQSQ4_P: chSQ4.2A R6SQ4.2 | length 887.8
  Top Layer w5: R6SQ4.2@2662.49,1325 2691.19,1296.31 2691.19,1256.45 2710.11,1237.53 2710.11,1152.49 2710,1152.37 2710,1023 2840.35,892.65 chSQ4.2A@2840.35,511
NSQSQ5_N: chSQ5.1A R7SQ5.2 | length 888
  Top Layer w5: chSQ5.1A@3355.35,511 3355.35,771.35 3452,868 3452,1196.51 3398.71,1249.8 3398.71,1296.31 R7SQ5.2@3427.41,1325
NSQSQ5_P: chSQ5.2A R6SQ5.2 | length 888
  Top Layer w5: chSQ5.2A@3340.35,511 3340.35,777.56 3437,874.21 3437,1190.29 3383.71,1243.58 3383.71,1296.31 R6SQ5.2@3355.02,1325
NSQSQ6_N: chSQ6.1A R7SQ6.2 | length 846.9
  Top Layer w5: chSQ6.1A@3855.35,511 3855.35,965.12 3907.28,1017.05 3907.28,1259.68 3907.28,1297.56 R7SQ6.2@3934.72,1325
NSQSQ6_P: chSQ6.2A R6SQ6.2 | length 846.9
  Top Layer w5: chSQ6.2A@3840.35,511 3840.35,971.33 3892.28,1023.26 3892.28,1259.68 3892.28,1297.56 R6SQ6.2@3864.84,1325
NSQSQ7_N: chSQ7.1A R7SQ7.2 | length 838.4
  Top Layer w5: R7SQ7.2@4351.55,1325 4351.55,1305 4324.02,1277.47 4324.02,1004.83 4355.35,973.51 chSQ7.1A@4355.35,511
NSQSQ7_P: chSQ7.2A R6SQ7.2 | length 838.4
  Top Layer w5: R6SQ7.2@4281.48,1325 4281.48,1305 4309.02,1277.47 4309.02,998.62 4340.35,967.29 chSQ7.2A@4340.35,511
NSQSQ8_N: chSQ8.1A R7SQ8.2 | length 850.1
  Top Layer w5: R7SQ8.2@4824.94,1325 4796.55,1296.61 4796.55,796.73 4855.35,737.94 chSQ8.1A@4855.35,511
NSQSQ8_P: chSQ8.2A R6SQ8.2 | length 850.1
  Top Layer w5: R6SQ8.2@4753.16,1325 4781.55,1296.61 4781.55,790.52 4840.35,731.72 chSQ8.2A@4840.35,511
NULL_N1: J1.40B R7SQ1.1 | length 275.1
  Top Layer w5: J1.40B@1275,1635 1275,1479 1325,1429 ; R7SQ1.1@1325,1381 1325,1429 ; 1325.35,1429 1325,1429
NULL_N2: J1.35B R7SQ2.1 | length 278.6
  Top Layer w5: J1.35B@1775,1635 1775,1479 1834.45,1419.55 R7SQ2.1@1834.45,1381
NULL_N3: J1.31B R7SQ3.1 | length 288.4
  Top Layer w5: J1.31B@2175,1635 2175,1494.31 2258.09,1411.22 R7SQ3.1@2258.09,1381
NULL_N4: J1.26B R7SQ4.1 | length 278.8
  Top Layer w5: J1.26B@2675,1635 2675,1479 2734.88,1419.12 R7SQ4.1@2734.88,1381
NULL_N5: J1.19B R7SQ5.1 | length 275.7
  Top Layer w5: J1.19B@3375,1635 3375,1488.27 3427.41,1435.86 R7SQ5.1@3427.41,1381